# Altium PCB Attenuator_10x100x.PcbDoc
Units mil, origin at the board's own origin, x right, y up, seen from the top; angles counter-clockwise.
Board outline 2520 x 1500 mil, 2 copper layers (Top Layer, Bottom Layer); 22 components, 17 nets, 60 pads, 0 vias.
Unrouted connection lines stored in the file: 15.
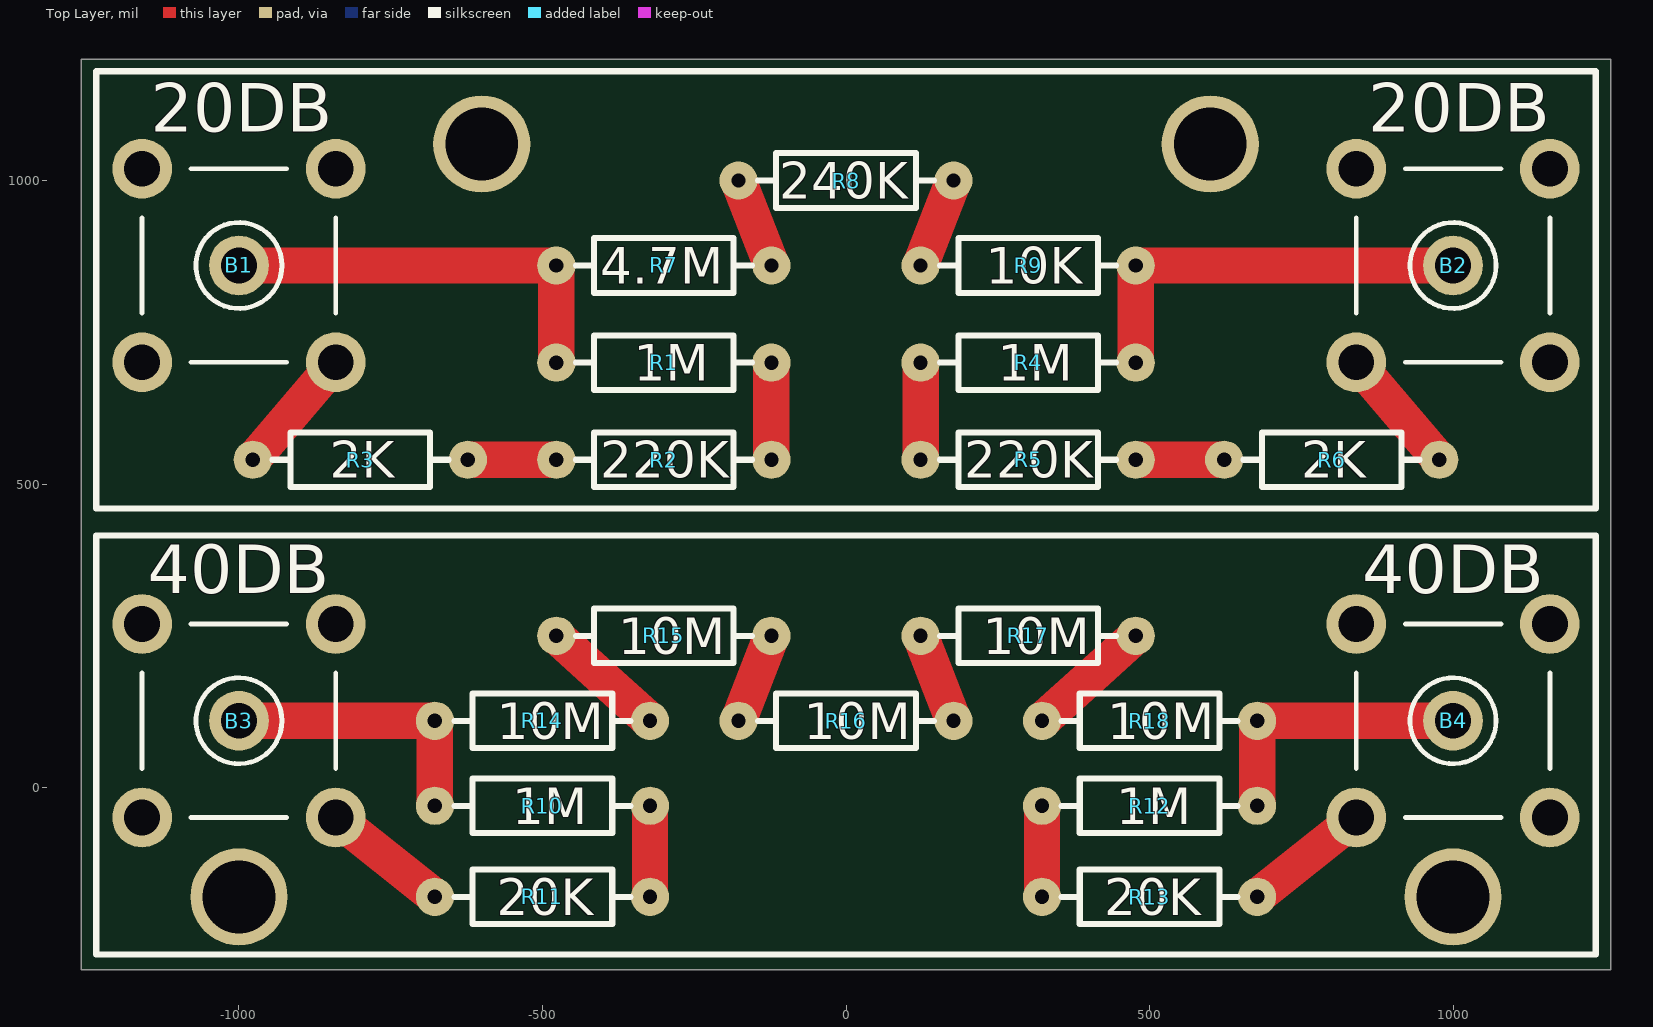
[diagram p0: Top Layer view]
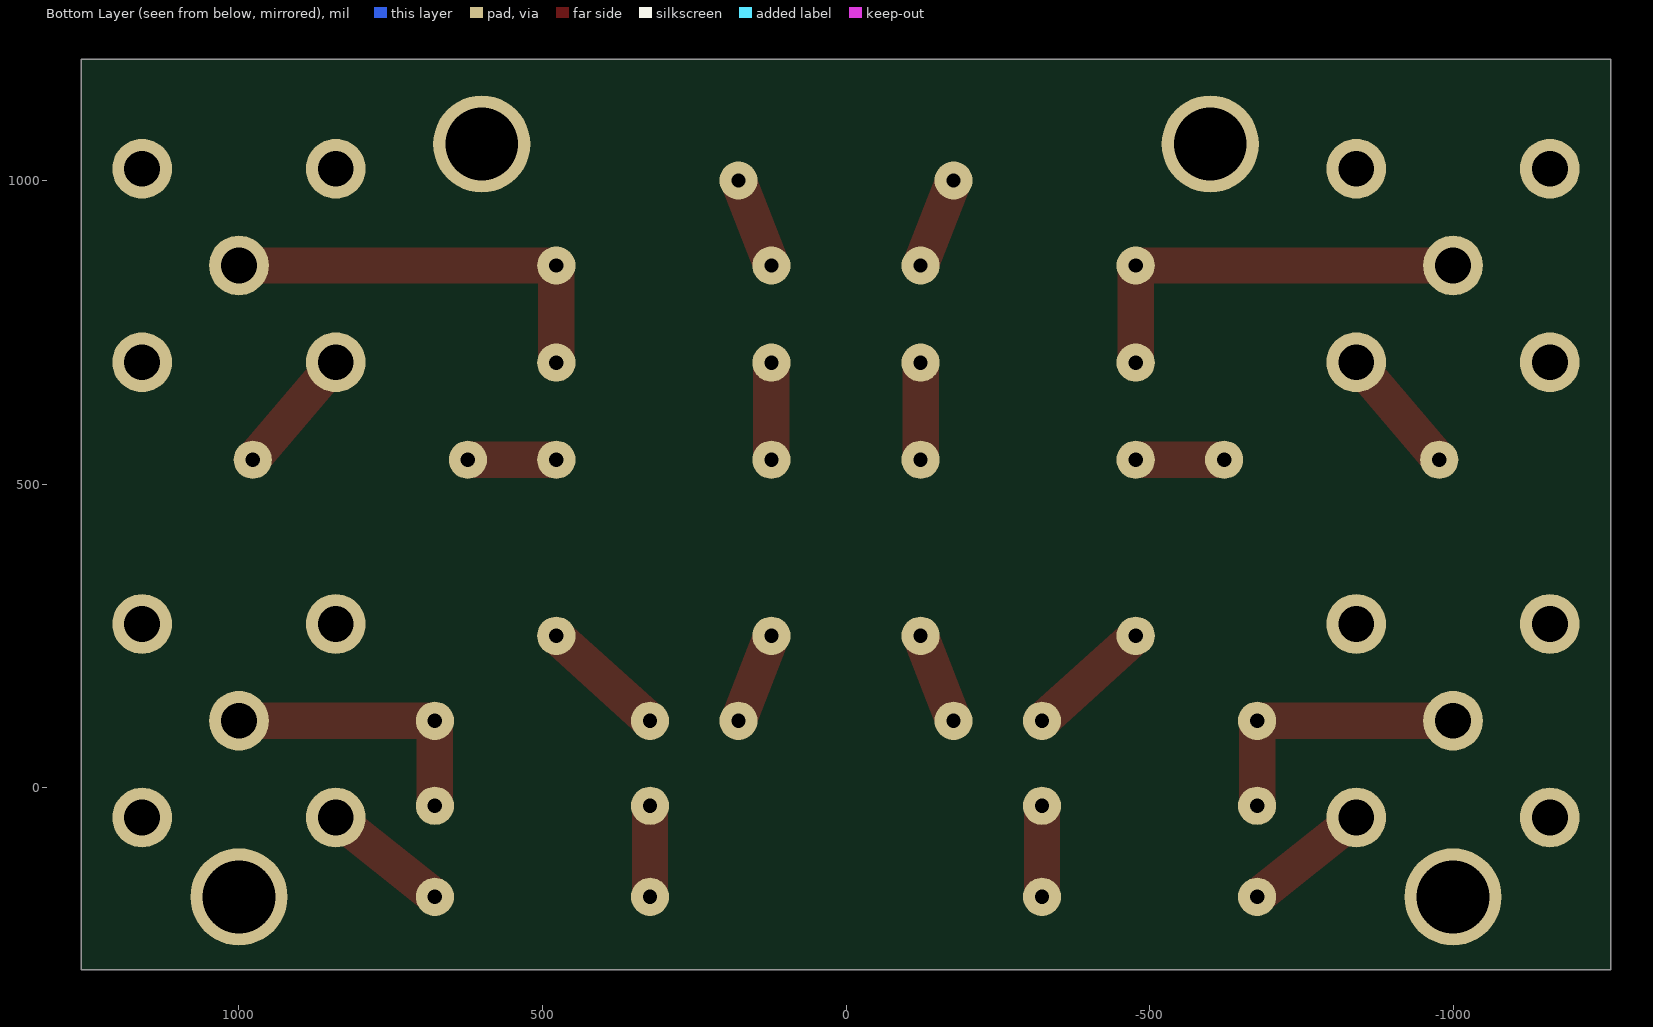
[diagram p1: Bottom Layer view, seen from below]
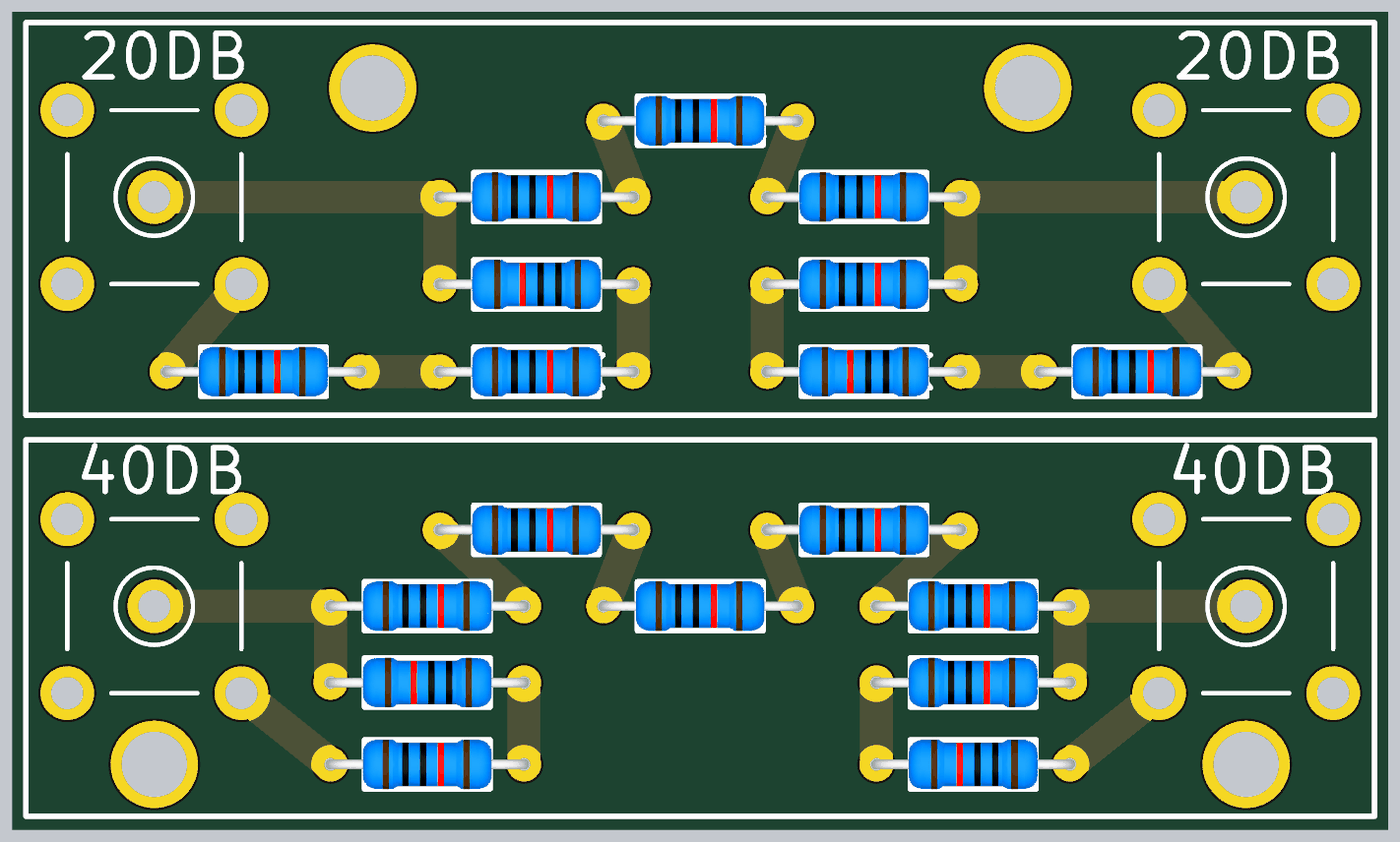
[diagram p2: 3D render of the assembled board from above, using the file's embedded part models]

## Layer stack, top to bottom
Top Solder: solder mask 0.4, Solder Resist, Dk 3.5
Top Layer: signal copper 1.4
Dielectric 1: dielectric 12.6, FR-4, Dk 4.8
Bottom Layer: signal copper 1.4
Bottom Solder: solder mask 0.4, Solder Resist, Dk 3.5

## Board outline
-1260,-300 -1260,1200 1260,1200 1260,-300

## Design rules (kind name [scope] priority, off if disabled: settings)
Clearance [All] p1: gap=10 ignorepadtopadclearanceinfootprint=FALSE except(0: Arc-Hole Track-Hole SMDPad-Hole THPad-Hole Via-Hole Fill-Hole Poly-Hole Region-Hole Text-Hole)
PolygonConnect [All] p1: connectstyle=Relief reliefconductorwidth=10 reliefentries=4 polygonreliefangle="90 Angle" airgapwidth=10
RoomDefinition Attenuator_10x100x [InComponentClass('Attenuator_10x100x')] p1: confinementstyle=ConfineIn formatcopy=TRUE lockcomponents=FALSE outline 3170,-1785 8565,-1785 8565,-1245 3170,-1245
RoutingVias [All] p1: holewidth=28 width=50 viastyle="Through Hole" minholewidth=28 minwidth=50 maxholewidth=28 maxwidth=50
SolderMaskExpansion [All] p1: expansion=4
Width [All] p1: maxlimit=120 minlimit=10 preferedwidth=60
30 further rules are at their usual default settings.

## Components (designator, comment, footprint, x,y, rotation, side; value= is the part's Value field where it differs from the comment)
B1 "BNC" BNC-5P -1000,860 r0 top
B2 "BNC" BNC-5P 1000,860 r0 top
B3 "BNC" BNC-5P -1000,110 r0 top
B4 "BNC" BNC-5P 1000,110 r0 top
R1 "1M" "RS 1/4W" -300,700 r180 top
R2 "220K" "RS 1/4W" -300,540 r0 top
R3 "2K" "RS 1/4W" -800,540 r0 top
R4 "1M" "RS 1/4W" 300,700 r0 top
R5 "220K" "RS 1/4W" 300,540 r180 top
R6 "2K" "RS 1/4W" 800,540 r0 top
R7 "4.7M" "RS 1/4W" -300,860 r0 top
R8 "240K" "RS 1/4W" 0,1000 r0 top
R9 "10K" "RS 1/4W" 300,860 r0 top
R10 "1M" "RS 1/4W" -500,-30 r180 top
R11 "20K" "RS 1/4W" -500,-180 r0 top
R12 "1M" "RS 1/4W" 500,-30 r0 top
R13 "20K" "RS 1/4W" 500,-180 r180 top
R14 "10M" "RS 1/4W" -500,110 r0 top
R15 "10M" "RS 1/4W" -300,250 r0 top
R16 "10M" "RS 1/4W" 0,110 r0 top
R17 "10M" "RS 1/4W" 300,250 r0 top
R18 "10M" "RS 1/4W" 500,110 r0 top

## Footprints (in the part's own frame and the unit in brackets; to place one, negate y for a bottom-side part, rotate by r counter-clockwise, add the part's x,y. Pads: shape width x height; smd on the part's side, far side on the other; paste and mask are expansions set on the pad)
BNC-5P [mm] "Connector; BNC"
  round 2.5 hole 1.5: 1(0,0) 2(-4.05,-4.05) 2(-4.05,4.05) 2(4.05,-4.05) 2(4.05,4.05)
  silkscreen extent -4.05,-4.05 4.05,4.05
"RS 1/4W" [mm] "直插色环电阻，脚距9mm，直径2.3mm"
  round 1.6 hole 0.6: 1(-4.5,0) 2(4.5,0)
  silkscreen extent -3.68,-1.14 3.68,1.14, body extent -4.72,-1.16 4.73,1.16, height 2.32

## Part data
B1 B2 B3 B4: library part BNC_1, "BNC Connector", Publisher="Altium Limited", Revision="17-Jul-2002: Re-released for DXP Platform."
R1 R2 R3 R4 R5 R6 R7 R8 R9 R10 R11 R12 R13 R14 R15 R16 R17 R18: library part R-CRR, "直插色环电阻", BOM名称=色环电阻, 学习资源=www.ooocke.com, 版权归属=源创客

## Free pads (board coordinates)
  round 160 hole 120: 3(-1000,-180) 3(-600,1060) 3(600,1060) 3(1000,-180)

## Nets (pads, with @x,y where several pads share a name; then routed paths per layer and width w, separated by ;. In a path a pad name is that pad's centre, name@x,y a point inside that pad or via, vN(x,y) a via of type N, cw(c..) or ccw(c..) an arc to the next point about the centre after c; other vN are vias at no path point)
GND: B1.2 B2.2 B3.2 B4.2 R3.1 R6.2 R11.1 R13.1 | length 839.9
  Top Layer w60: R3.1 B1.2@-840.55,700.55 ; B3.2@-840.55,-49.45 R11.1 ; R13.1 B4.2@840.55,-49.45 ; B2.2@840.55,700.55 R6.2
NetB1_1: B1.1 R1.2 R7.1 | length 682.8
  Top Layer w60: B1.1 R7.1 R1.2
NetB2_1: B2.1 R4.2 R9.2 | length 682.8
  Top Layer w60: R4.2 R9.2 B2.1
NetB3_1: B3.1 R10.2 R14.1 | length 462.8
  Top Layer w60: B3.1 R14.1 R10.2
NetB4_1: B4.1 R12.2 R18.2 | length 462.8
  Top Layer w60: R12.2 R18.2 B4.1
NetR1_1: R1.1 R2.2 | length 160
  Top Layer w60: R2.2 R1.1
NetR2_1: R2.1 R3.2 | length 145.7
  Top Layer w60: R3.2 R2.1
NetR4_1: R4.1 R5.2 | length 160
  Top Layer w60: R5.2 R4.1
NetR5_1: R5.1 R6.1 | length 145.7
  Top Layer w60: R5.1 R6.1
NetR7_2: R7.2 R8.1 | length 150.2
  Top Layer w60: R8.1 R7.2
NetR8_2: R8.2 R9.1 | length 150.2
  Top Layer w60: R9.1 R8.2
NetR10_1: R10.1 R11.2 | length 150
  Top Layer w60: R11.2 R10.1
NetR12_1: R12.1 R13.2 | length 150
  Top Layer w60: R13.2 R12.1
NetR14_2: R14.2 R15.1 | length 208.4
  Top Layer w60: R15.1 R14.2
NetR15_2: R15.2 R16.1 | length 150.2
  Top Layer w60: R16.1 R15.2
NetR16_2: R16.2 R17.1 | length 150.2
  Top Layer w60: R17.1 R16.2
NetR17_2: R17.2 R18.1 | length 208.4
  Top Layer w60: R18.1 R17.2

## Silkscreen, mask and mechanical layers (free items; w line width, h text height)
Top Overlay:
  lines w10: -1235,-275 -1235,415 1235,415 1235,-275 -1235,-275 ; -1235,460 -1215,460 1235,460 1235,1180 -1235,1180 -1235,460
  text "20DB" at -1145,1080 h80
  text "20DB" at 860,1080 h80
  text "40DB" at -1150,320 h80
  text "40DB" at 850,320 h80
Mechanical 1:
  the board outline again, w10